# Altium PCB Copy of PCB1.PcbDoc (part 5 of 9)
Units mm, origin at the board's own origin, x right, y up, seen from the top; angles counter-clockwise.
Board outline 100 x 100 mm, 6 copper layers (Top Layer, Int1 (GND), Int2 (Sign), Int3 (Sign), Int4 (PWR), Bottom Layer), stack 1.538 mm thick; 614 components, 712 nets, 3013 pads, 501 vias.
Unrouted connection lines stored in the file: 259.
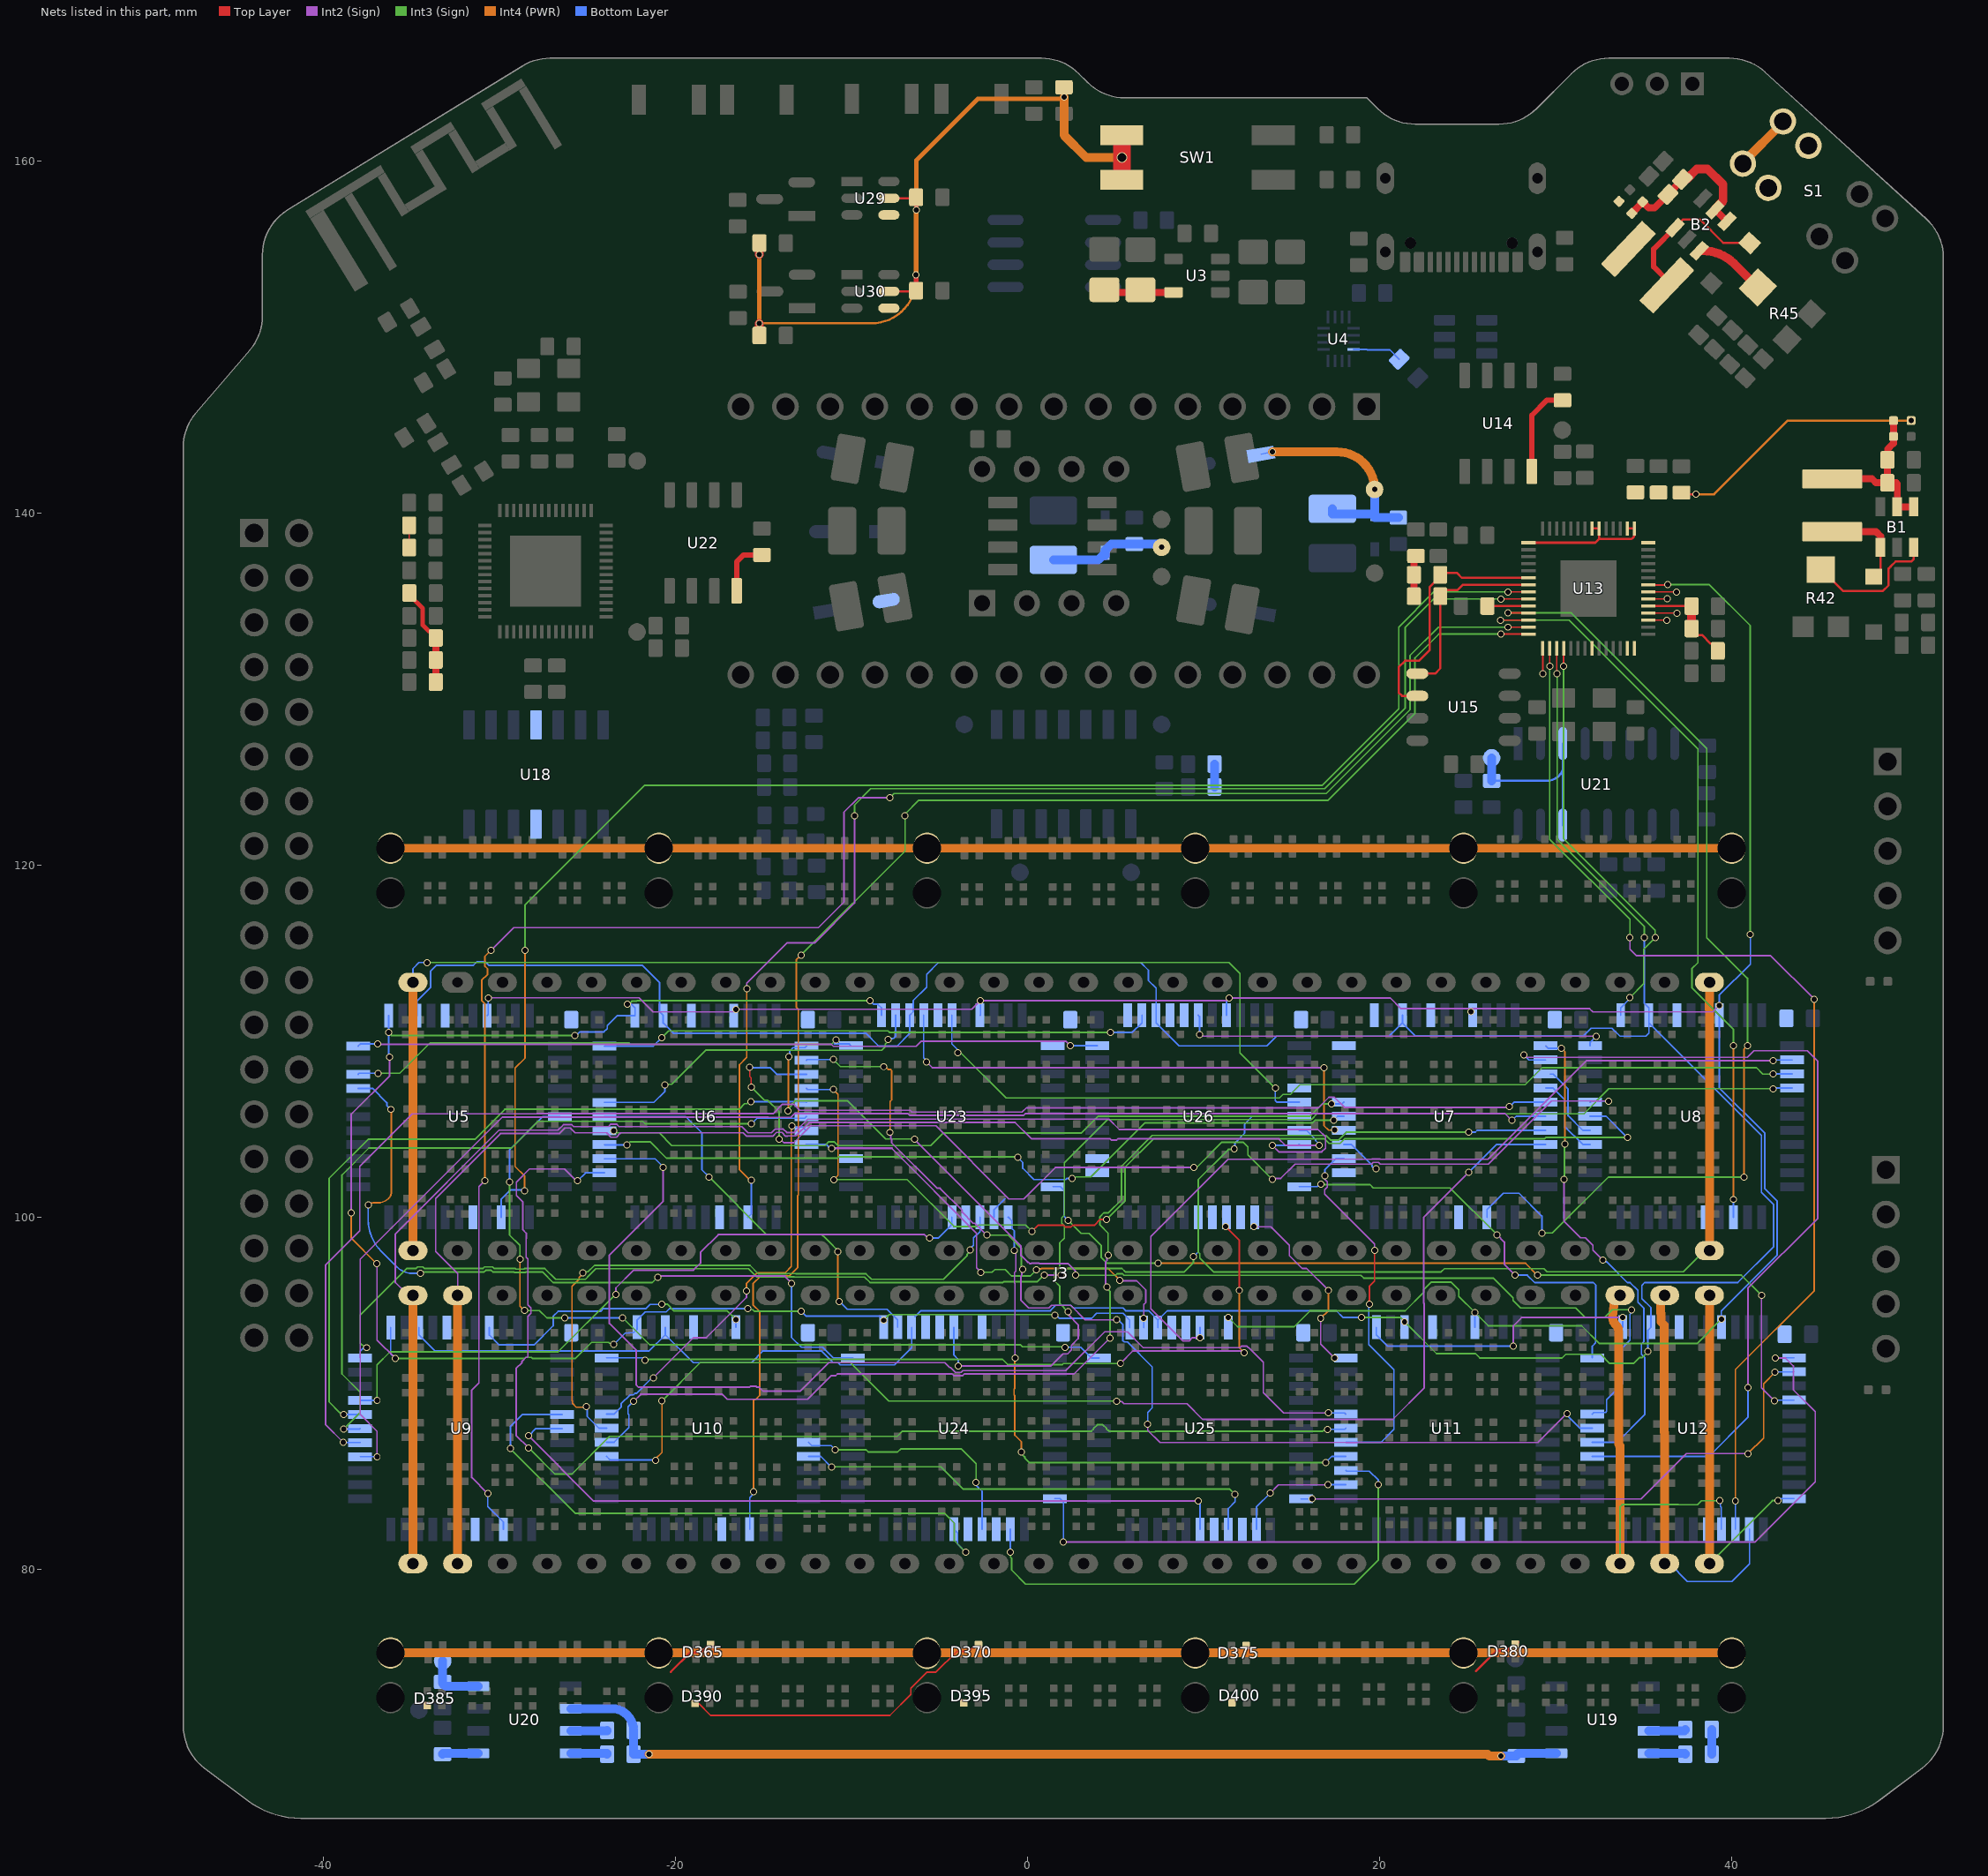
[diagram p8: the nets of this part, all layers, seen from the top]

## Via types
v1: diameter 0.4, hole 0.3, Top Layer to Bottom Layer, tented both sides, 494 vias
v2: diameter 0.4, hole 0.3, Top Layer to Bottom Layer, 5 vias
v3: diameter 0.4, hole 0.3, Top Layer to Bottom Layer, tented top, 1 vias
v4: diameter 0.6, hole 0.5, Top Layer to Bottom Layer, 1 vias

## Nets (pads, with @x,y where several pads share a name; then routed paths per layer and width w, separated by ;. In a path a pad name is that pad's centre, name@x,y a point inside that pad or via, vN(x,y) a via of type N, cw(c..) or ccw(c..) an arc to the next point about the centre after c; other vN are vias at no path point) (continued)
B_B58: J3.58 U12.15 | length 26.3
  Int3 (Sign) w0.09: J3.58@33.648,80.336 33.648,83.557 33.778,83.686 36.968,83.686 36.978,83.677 38.041,83.677 38.269,83.904 v1(39.305,83.904)
  Int4 (PWR) w0.5: J3.58@33.648,80.336 33.648,87.03 33.566,87.112 33.566,93.528 ccw(c33.066,93.528) 33.409,93.891 cw(c33.805,94.312) 33.232,94.379 33.373,95.576 J3.58@33.648,95.576
  Bottom Layer w0.09: v1(39.305,83.904) 39.355,83.854 39.355,83.569 39.405,83.519 U12.15@39.405,82.288
B_B59: J3.59 U12.13 | length 23
  Int4 (PWR) w0.5: J3.59@36.188,80.336 36.188,87.766 36.156,87.797 36.156,93.889 35.982,94.064 35.982,94.542 35.959,94.564 35.959,95.347 J3.59@36.188,95.576
  Bottom Layer w0.09: J3.59@36.188,80.336 36.463,80.336 37.478,79.32 39.998,79.32 41.005,80.327 U12.13@41.005,82.288
B_B60: J3.60 U12.11 | length 21.6
  Int3 (Sign) w0.09: J3.60@38.728,80.336 J3.60@38.728,80.336 39.196,80.802 39.196,80.804 42.302,83.91 v1(42.63,83.91)
  Int4 (PWR) w0.5: J3.60@38.728,80.336 J3.60@38.728,95.576
  Bottom Layer w0.09: v1(42.63,83.91) 42.621,83.91 42.734,84.023 U12.11@43.54,84.023
BB_1_1: J3.1 U26.5 | length 72.8
  Int3 (Sign) w0.09: v1(-34.139,114.48) 11.43,114.48 12.06,113.85 12.06,109.35 v1(14.064,107.347)
  Int4 (PWR) w0.5: J3.1@-34.932,98.116 J3.1@-34.932,113.356
  Bottom Layer w0.09: J3.1@-34.932,113.356 -34.932,114.138 -34.59,114.48 v1(-34.139,114.48) ; v1(14.064,107.347) 14.064,106.646 14.162,106.548 U26.5@15.422,106.548
BB_30_1: J3.30 U26.6 | length 57.4
  Int3 (Sign) w0.09: v1(11.729,103.904) 11.686,103.861 11.394,103.861 9.687,102.154 9.687,98.026 9.777,97.936 9.777,97.68 10.553,96.904 23.486,96.904 23.674,97.092 29.323,97.092 29.505,96.91 37.247,96.91 38.453,98.116 J3.30@38.728,98.116
  Int4 (PWR) w0.5: J3.30@38.728,98.116 38.728,111.795 38.71,111.812 38.71,112.29 38.728,112.308 J3.30@38.728,113.356
  Bottom Layer w0.09: v1(11.729,103.904) 11.772,103.948 11.772,104.239 12.318,104.785 12.318,105.308 12.758,105.748 U26.6@15.422,105.748
BB_31_1: J3.31 U26.8 | length 81.4
  Int2 (Sign) w0.09: J3.31@-34.932,95.576 -35.207,95.576 -35.929,96.298 -35.929,99.067 -30.043,104.954 -26.698,104.954 -26.381,105.272 -25.915,105.272 -25.797,105.154 -23.826,105.154 -23.68,105.299 -23.372,105.299 -23.227,105.154 -16.248,105.154 -15.899,104.805 -14.571,104.805 -14.358,105.018 -13.892,105.018 -13.699,104.825 -13.257,104.825 -12.497,105.585 4.609,105.585 5.199,104.995 16.496,104.995 16.916,104.575 16.916,103.94 16.698,103.722 14.269,103.722 v1(13.897,104.094)
  Int4 (PWR) w0.5: J3.31@-34.932,80.336 J3.31@-34.932,95.576
  Bottom Layer w0.09: v1(13.897,104.094) 15.369,104.094 U26.8@15.422,104.148
BB_32_1: J3.32 U26.7 | length 76.2
  Int2 (Sign) w0.09: J3.32@-32.392,95.576 -32.392,96.82 -33.645,98.072 -33.645,101.083 -29.964,104.764 -26.62,104.764 -26.302,105.082 -25.994,105.082 -25.717,104.805 -23.898,104.805 -23.898,104.773 -23.68,104.555 -23.372,104.555 -23.154,104.773 -23.154,104.805 -16.168,104.805 -15.977,104.615 -14.492,104.615 -14.279,104.828 -13.971,104.828 -13.757,104.615 -13.664,104.615 -13.644,104.635 -13.179,104.635 -12.419,105.395 -0.715,105.395 0.213,104.466 4.675,104.466 4.74,104.402 5.048,104.402 5.113,104.466 14.269,104.466 14.641,104.094 v1(16.544,104.094)
  Int4 (PWR) w0.5: J3.32@-32.392,80.336 J3.32@-32.392,95.576
  Bottom Layer w0.09: U26.7@15.422,104.948 15.847,104.948 16.354,104.441 16.354,104.369 16.544,104.178 v1(16.544,104.094)
BB_BOTTOM_RAIL_1: J3.63 S1.7 | length 76.2
  Int4 (PWR) w0.5: J3.63@-36.202,75.256 J3.63@-20.962,75.256 J3.63@9.518,75.256 J3.63@24.758,75.256 J3.63@39.998,75.256
BB_TOP_RAIL_1: J3.61 S1.3 | length 76.2
  Int4 (PWR) w0.5: J3.61@-36.202,120.976 J3.61@-20.962,120.976 J3.61@-5.722,120.976 J3.61@9.518,120.976 J3.61@24.758,120.976 J3.61@39.998,120.976
BC0_3: U6.27 U7.29 | length 43
  Int3 (Sign) w0.09: v1(-23.526,104.927) -23.404,104.805 -20.943,104.805 -20.221,104.084 -11.52,104.084 -11.306,104.298 -10.998,104.298 -10.785,104.084 -7.971,104.084 -7.968,104.081 -7.502,104.081 -7.5,104.084 -5.521,104.084 -4.814,104.791 3.035,104.791 3.998,105.754 16.037,105.754 16.735,106.452 v1(17.261,106.452)
  Bottom Layer w0.09: v1(17.261,106.452) 17.856,106.452 U7.29@17.952,106.548
BC1_3: U6.26 U7.28 | length 44.8
  Int3 (Sign) w0.09: v1(-22.763,104.125) -22.763,104.113 -22.579,104.297 -21.452,104.297 -20.522,103.368 -10.811,103.368 -10.734,103.445 -0.614,103.445 v1(-0.578,103.409) ; v1(2.508,102.225) 2.529,102.246 2.529,102.3 3.59,102.3 6.664,105.374 16.194,105.374 16.345,105.525 v1(17.384,105.525)
  Bottom Layer w0.09: U6.26@-24.048,104.133 -24.04,104.125 v1(-22.763,104.125) ; v1(-0.578,103.409) -0.289,103.12 -0.289,102.796 0.354,102.153 2.157,102.153 2.225,102.221 2.504,102.221 v1(2.508,102.225) ; v1(17.384,105.525) 17.607,105.748 U7.28@17.952,105.748
BD0_3: U6.3 U8.29 | length 63.1
  Top Layer w0.09: v1(-15.796,108.538) -15.796,108.003 -15.721,107.928 -15.721,107.41 v1(-15.702,107.391)
  Int2 (Sign) w0.09: v1(-14.125,104.456) -14.075,104.456 -13.863,104.244 -13.3,104.244 -12.34,105.205 -5.225,105.205 -1.071,101.051 -0.221,101.051 1.568,102.839 v1(9.434,102.839) ; v1(13.897,102.161) 13.956,102.22 14.374,102.22 15.182,103.028 19.524,103.028 19.625,103.128 19.933,103.128 20.033,103.028 26.163,103.028 29.746,106.611 v1(33.006,106.611)
  Int3 (Sign) w0.09: v1(-15.702,107.391) -14.976,106.665 -14.791,106.665 -14.125,105.999 v1(-14.125,104.456) ; v1(9.434,102.839) 9.592,102.839 11.03,104.276 12.24,104.276 12.511,104.005 12.511,103.547 v1(13.897,102.161)
  Bottom Layer w0.09: v1(-15.796,108.538) -15.768,108.509 -14.648,108.509 -14.272,108.133 U6.3@-12.578,108.133 ; U8.29@31.952,106.548 32.016,106.611 v1(33.006,106.611)
BD1_3: U6.4 U8.28 | length 59.5
  Top Layer w0.09: v1(0.238,99.21) 0.578,99.55 2.048,99.55 2.142,99.456 2.45,99.456 2.543,99.55 3.774,99.55 4.114,99.89 v1(4.475,99.89)
  Int3 (Sign) w0.09: v1(-11.013,102.148) -6.857,102.148 -4.198,99.489 -2.879,99.489 -2.795,99.573 -0.125,99.573 v1(0.238,99.21) ; v1(4.475,99.89) 5.518,100.932 5.518,102.839 7.145,104.466 16.858,104.466 17.117,104.208 17.74,104.208 17.998,104.466 29.348,104.466 29.424,104.542 v1(34.07,104.542)
  Int4 (PWR) w0.09: v1(-11.05,107.266) -10.78,106.996 -10.78,102.388 -11.013,102.155 v1(-11.013,102.148)
  Bottom Layer w0.09: U6.4@-12.578,107.333 -12.511,107.266 v1(-11.05,107.266) ; U8.28@31.952,105.748 32.864,105.748 v1(34.07,104.542)
BE0_3: U6.5 U9.29 | length 43.7
  Int3 (Sign) w0.09: v1(-38.877,88.808) -38.961,88.808 -39.052,88.899 -39.079,88.899 -39.694,89.514 -39.694,102.224 -37.476,104.442 -31.419,104.442 -29.714,106.147 -16.398,106.147 -16.086,106.459 -15.937,106.459 -15.819,106.576 v1(-15.736,106.576)
  Bottom Layer w0.09: v1(-38.877,88.808) U9.29@-37.93,88.808 ; v1(-15.736,106.576) -12.621,106.576 U6.5@-12.578,106.533
BE1_3: U6.6 U9.28 | length 44.1
  Int3 (Sign) w0.09: v1(-38.877,87.973) -37.93,88.919 -37.93,90.07 -38.97,91.11 -38.97,102.411 -37.438,103.943 -29.339,103.943 -27.819,105.462 -21.874,105.462 -21.731,105.319 v1(-15.702,105.319)
  Bottom Layer w0.09: v1(-38.877,87.973) -37.965,87.973 U9.28@-37.93,88.008 ; v1(-15.702,105.319) -15.383,105.639 -12.672,105.639 U6.6@-12.578,105.733
BF0_3: U6.7 U10.29 | length 23.5
  Int2 (Sign) w0.09: v1(-21.275,90.884) -18.993,93.167 -18.265,93.167 -15.981,95.451 -15.981,95.825 v1(-15.986,95.829)
  Int4 (PWR) w0.09: v1(-15.986,95.829) -15.986,96.239 -15.365,96.86 -13.777,96.86 -13.433,97.204 -13.433,105.175 v1(-13.411,105.197)
  Bottom Layer w0.09: U10.29@-23.93,88.823 -23.505,88.823 -23.104,89.224 -23.104,89.324 -23.104,89.409 -22.597,89.916 -22.412,89.916 -22.325,90.003 -22.245,90.003 -21.395,90.853 -21.395,90.865 -21.376,90.884 v1(-21.275,90.884) ; v1(-13.411,105.197) -13.352,105.138 -12.783,105.138 U6.7@-12.578,104.933
BG0_3: U6.25 U11.29 | length 63.2
  Int2 (Sign) w0.09: v1(-20.73,102.829) -20.713,102.812 -20.713,100.931 -23.775,97.869 -23.775,93.971 -22.245,92.441 -22.245,90.476 -22.123,90.353 -15.814,90.353 -15.754,90.413 -15.446,90.413 -15.387,90.353 -15.256,90.353 -15.031,90.128 -12.93,90.128 -11.309,91.749 -4.709,91.749 -4.434,91.475 -4.385,91.475 -4.105,91.195 -3.797,91.195 -3.693,91.299 2.164,91.299 4.37,93.506 5.653,93.506 6.553,92.605 12.064,92.605 12.145,92.686 12.453,92.686 12.534,92.605 12.55,92.605 13.383,91.773 13.383,90.039 14.527,88.895 v1(17.082,88.895)
  Bottom Layer w0.09: U6.25@-24.048,103.333 -21.172,103.333 -20.73,102.891 v1(-20.73,102.829) ; v1(17.082,88.895) 17.998,88.895 U11.29@18.07,88.823
BG1_3: U6.24 U11.28 | length 70.4
  Int2 (Sign) w0.09: v1(-28.363,86.905) -29.072,87.615 -29.072,91.418 -28.735,91.756 -28.735,91.834 -28.517,92.052 -28.438,92.052 -28.399,92.091 -28.399,94.378 -28.223,94.554 -28.223,94.862 -28.399,95.038 -28.399,97.638 -28.499,97.738 -28.499,98.263 -28.503,98.266 -28.503,98.791 -28.495,98.799 -28.495,99.107 -28.685,99.297 -28.685,100.87 -29.057,101.242 -29.057,102.009 -28.313,102.753 -26.325,102.753 -25.65,102.078 v1(-25.582,102.078)
  Int3 (Sign) w0.09: v1(-28.363,86.905) -26.878,85.42 -25.893,85.42 -23.755,87.558 -7.407,87.558 -7.112,87.853 3.615,87.853 3.734,87.971 3.734,88.005 3.952,88.223 4.26,88.223 4.478,88.005 4.478,87.958 4.53,87.906 4.577,87.906 4.63,87.853 4.682,87.853 6.881,87.853 6.917,87.817 7.225,87.817 7.261,87.853 16.748,87.853 16.797,87.901 16.967,87.901 v1(17.027,87.961)
  Bottom Layer w0.09: v1(-25.582,102.078) -25.128,102.533 U6.24@-24.048,102.533 ; v1(17.027,87.961) 18.007,87.961 U11.28@18.07,88.023
BH0_3: U6.1 U12.29 | length 66
  Int2 (Sign) w0.09: v1(-6.421,104.456) -6.421,104.412 -0.384,98.375 -0.384,97.831 -0.011,97.458 0.033,97.458 0.11,97.382 0.19,97.382 0.202,97.394 0.647,97.394 0.659,97.382 2.288,97.382 2.706,96.964 v1(2.706,96.729)
  Int3 (Sign) w0.09: v1(-13.62,106.059) -13.62,106.143 -13.433,106.33 -13.433,106.41 -13.222,106.621 -10.239,106.621 -8.079,104.461 -6.426,104.461 v1(-6.421,104.456) ; v1(2.706,96.729) 2.721,96.714 4.988,96.714 5.074,96.801 5.382,96.801 5.469,96.714 18.926,96.714 19.086,96.554 26.447,96.554 27.571,95.431 27.571,95.277 27.994,94.854 31.137,94.854 31.679,94.312 32.76,94.312 33.204,94.756 v1(34.303,94.756)
  Int4 (PWR) w0.09: v1(-13.62,106.059) -13.573,106.105 -13.6,106.132 -13.6,109.112 v1(-13.58,109.132)
  Bottom Layer w0.09: v1(-13.58,109.132) -13.521,109.191 -13.521,109.459 -13.335,109.645 -12.666,109.645 U6.1@-12.578,109.733 ; U12.29@32.07,88.823 32.166,88.92 32.827,88.92 32.89,88.982 32.89,89.643 33.771,90.524 33.771,92.584 34.21,93.023 34.21,94.493 34.295,94.578 34.311,94.578 34.311,94.706 34.303,94.714 v1(34.303,94.756)
BH1_3: U6.2 U12.28 | length 62.3
  Int2 (Sign) w0.09: v1(-7.825,104.833) -7.78,104.788 -7.78,104.498 -7.735,104.453 -7.735,104.24 -5.15,101.655 -4.985,101.655 -3.721,100.391 -3.721,100.29 -3.103,99.672 -3.006,99.672 v1(-2.328,98.994) ; v1(-0.297,97.045) -0.339,97.003 -0.339,96.71 -0.384,96.665 -0.384,95.291 0.054,94.854 1.202,94.854 1.353,95.005 2.442,95.005 3.265,94.183 v1(5.057,94.183) ; v1(6.814,88.25) 6.814,87.902 7.508,87.209 28.983,87.209 v1(30.64,88.865)
  Int3 (Sign) w0.09: v1(-11.05,108.973) -10.644,108.568 v1(-8.176,108.568) ; v1(-2.328,98.994) -1.112,98.994 -0.369,98.251 -0.369,97.226 -0.356,97.213 -0.356,97.105 v1(-0.297,97.045)
  Int4 (PWR) w0.09: v1(-8.176,108.568) -8.092,108.568 -7.934,108.409 -7.799,108.409 -7.735,108.346 -7.735,106.676 -7.825,106.586 v1(-7.825,104.833)
  Bottom Layer w0.09: U6.2@-12.578,108.933 -12.537,108.973 v1(-11.05,108.973) ; v1(5.057,94.183) 5.135,94.183 5.395,93.923 5.395,93.008 5.48,92.923 5.659,92.923 7.071,91.511 7.071,89.18 6.814,88.923 v1(6.814,88.25) ; v1(30.64,88.865) 30.64,88.758 31.375,88.023 U12.28@32.07,88.023
BOTTOM1_RGB_OUT_8: D365.4 D385.1 | length 3.1
  Top Layer w0.127: -20.28,74.18 -19.17,75.291 -18.553,75.291 -18.183,75.661 -18.032,75.661 D365.4@-17.88,75.813
BOTTOM2_RGB_OUT_8: D370.4 D390.1 | length 18.1
  Top Layer w0.09: D390.1@-18.71,72.393 -18.025,71.707 -7.837,71.707 -6.644,72.9 -6.644,73.248 -5.721,74.171 -5.211,74.171 -4.042,75.34 -3.356,75.34 -3.149,75.548 -2.969,75.548 D370.4@-2.799,75.718
BOTTOM3_RGB_OUT_8: D375.4 D395.1
BOTTOM4_RGB_OUT_8: D380.4 D400.1 | length 3.1
  Top Layer w0.127: 25.47,74.23 26.621,75.382 27.137,75.382 27.213,75.459 27.315,75.459 27.567,75.711 27.718,75.711 D380.4@27.87,75.863
BUCK1_3v3: C3.2 C4.2 C5.2 C7.2 C8.2 C9.2 C10.2 C11.2 C12.2 C14.2 C46.2 C48.2 C62.2 C63.2 C64.2 C70.2 C85.2 C86.2 JP1.2 JP3.2 L4.1 R1.1 R8.2 R9.2 R16.2 R17.2 R19.2 R20.2 R29.2 R30.2 R35.2 R36.2 R38.2 R39.2 R47.1 R49.1 S1.4 S1.8 SW1.3 SW1.4 U3.5 U4.4 U13.1 U13.10 U13.22 U13.33 U13.42 U13.43 U13.44 U13.48 U13.49 U14.8 U19.5 U20.2 U20.5 U22.8 U23.1 U29.5 U30.5 | length 167.7
  Top Layer w0.09: R38.2@-35.145,138.058 L4.1@-35.145,139.318 ; R39.2@-35.14,135.37 R39.2@-35.14,135.47
  Top Layer w0.127: U30.5@-7.894,152.608 -6.395,152.608 C86.2@-6.345,152.658 ; U29.5@-7.895,157.908 -6.395,157.908 C85.2@-6.345,157.958 ; v1(2.055,163.662) R1.1@2.055,164.208 ; C3.2@4.355,152.708 C3.2@4.505,152.558 ; C12.2@26.109,134.735 U13.10@28.453,134.735 ; U13.1@28.453,138.335 32.246,138.335 32.457,138.546 ; U13.49@32.057,139.138 U13.48@32.457,139.138 32.457,138.546 ; U13.44@34.057,139.138 U13.43@34.457,139.138 ; C7.2@34.457,141.129 C7.2@34.524,141.196 C7.2@34.532,141.188 ; U13.43@34.461,138.789 cw(c34.218,138.789) 34.218,138.546 32.457,138.546 ; U13.33@35.26,134.735 37.711,134.735 C10.2@37.718,134.728 ; C9.2@37.142,141.179 37.237,141.084 v1(37.964,141.084) ; C11.2@37.718,133.458 37.718,133.419 38.051,133.086 38.308,133.086 38.789,132.605 38.869,132.605 39.203,132.271 R8.2@39.203,132.191
  Top Layer w0.254: R39.2@-35.14,135.37 -34.38,134.61 -34.38,133.66 -34.013,133.293 -33.913,133.293 -33.64,133.02 C64.2@-33.64,132.92 ; C86.2@-6.345,152.658 v1(-6.345,153.558) ; C85.2@-6.345,157.958 -6.33,157.942 v1(-6.33,157.245)
  Top Layer w0.3: U22.8@-16.54,135.602 -16.54,137.245 -16.145,137.64 C70.2@-15.105,137.64 ; U14.8@28.635,142.385 28.635,145.575 29.485,146.425 C14.2@30.381,146.425
  Top Layer w0.4: C63.2@-33.64,130.42 C62.2@-33.64,131.67 C64.2@-33.64,132.92 ; C3.2@4.505,152.558 U3.5@8.28,152.558 ; R35.2@21.935,135.297 R36.2@21.935,136.513 21.945,136.522 21.945,137.471 R9.2@22.055,137.581
  Top Layer w0.5: R49.1@-15.245,150.108 v1(-15.245,150.795) ; v1(-15.245,154.695) R47.1@-15.245,155.358 ; C11.2@37.718,133.458 C10.2@37.718,134.728
  Top Layer w1: SW1.4@5.339,158.949 v4(5.339,160.219) SW1.3@5.339,161.489
  Int4 (PWR) w0.127: v1(-15.245,150.795) -8.885,150.795 ccw(c-8.885,153.335) -6.345,153.335 v1(-6.345,153.558) ; v1(37.964,141.084) 38.994,141.084 43.179,145.269 v1(50.183,145.269)
  Int4 (PWR) w0.254: v1(-15.245,150.795) v1(-15.245,154.695) ; v1(-6.345,153.558) -6.345,157.23 v1(-6.33,157.245) -6.33,160.061 -2.835,163.556 v1@2.055,163.556
  Int4 (PWR) w0.5: v1(-21.525,69.495) 26.13,69.495 26.217,69.408 v1(26.87,69.408) ; v1(2.055,163.662) 2.055,163.556 2.055,161.489 3.325,160.219 v4(5.339,160.219) ; S1.8@40.63,159.871 40.63,159.932 42.902,162.204 S1.4@42.902,162.265
  Bottom Layer w0.09: U4.4@18.506,149.308 19.277,149.308 19.291,149.294 20.566,149.294 C5.2@21.102,148.758
  Bottom Layer w0.127: S1.8@40.63,159.871 S1.8@40.63,159.932 ; S1.4@42.902,162.204 S1.4@42.902,162.265
  Bottom Layer w0.5: C48.2@-33.245,69.508 cw(c-33.2,69.508) -33.2,69.553 U20.5@-31.22,69.553 ; U20.2@-25.97,72.093 -23.63,72.093 cw(c-23.63,70.858) R19.2@-22.395,70.858 R20.2@-22.395,69.508 -21.538,69.508 v1(-21.525,69.495) ; R29.2@10.605,124.458 R30.2@10.605,125.758 ; v1(26.87,69.408) C46.2@27.755,69.408 cw(c27.9,69.408) 27.9,69.553 U19.5@30.03,69.553 ; R17.2@38.855,69.508 R16.2@38.855,70.908
BUCK1_FB_11: B1.3 R42.2 | length 7.8
  Top Layer w0.127: R42.2@45.06,136.81 45.11,136.81 46.337,135.583 48.571,135.583 48.905,135.916 48.905,136.86 49.015,136.971 49.015,136.978 49.302,137.265 50.187,137.265 50.34,137.418 B1.3@50.34,138.075
BUCK1_SW_11: B1.1 D410.2 L5.1 | length 5.3
  Top Layer w0.127: D410.2@48.055,136.408 48.068,136.408 48.455,136.794 48.455,138.06 B1.1@48.44,138.075
  Top Layer w0.4: L5.1@45.705,138.958 48.195,138.958 48.455,138.698 48.455,138.09 B1.1@48.44,138.075 ; D410.2@48.046,136.417 D410.2@48.055,136.408
BUCK1_VIN_11: B1.4 B1.5 C79.2 C80.2 JP1.1 JP2.1 L5.2 | length 10.1
  Top Layer w0.4: L5.2@45.705,141.958 47.972,141.958 48.15,141.78 48.195,141.735 C80.2@48.84,141.735 ; JP1.1@49.183,145.269 JP2.1@49.183,144.369 49.183,143.983 48.855,143.655 48.855,143.055 C79.2@48.84,143.04 C80.2@48.84,141.735 ; B1.4@50.34,140.375 49.455,140.375 49.405,140.325 49.405,140.173 49.39,140.187 B1.5@49.39,140.375 49.405,140.39 49.405,141.661 49.33,141.735 C80.2@48.84,141.735
BUCK2_FB_11: B2.3 R45.2 | length 4.1
  Top Layer w0.5: B2.3@38.146,154.924 38.34,154.924 cw(c38.34,152.384) 40.136,154.18 R45.2@41.473,152.843
BUCK2_SW_11: B2.1 D411.2 L6.1 | length 9.2
  Top Layer w0.127: B2.1@36.768,156.232 37.234,156.698 38.182,156.698 39.503,155.377 40.997,155.377 D411.2@41.015,155.36 D411.2@41.014,155.242
  Top Layer w0.3: L6.1@36.305,152.958 36.305,153.262 35.56,154.006 35.56,155.025 B2.1@36.768,156.232
BUCK2_VIN_11: B2.4 B2.5 C83.2 C84.2 JP3.1 JP4.1 L6.2 | length 9.5
  Top Layer w0.4: JP3.1@34.32,157.043 34.32,157.066 34.929,157.675 JP4.1@34.929,157.697 35.268,157.359 35.617,157.359 C83.2@36.374,158.116 36.651,158.405 36.917,158.686 C84.2@37.193,158.975 ; B2.5@39.04,157.247 39.058,157.247 39.712,156.593 B2.4@39.729,156.593
  Top Layer w0.5: C84.2@37.193,158.975 37.42,158.975 38.014,159.57 38.619,159.57 39.503,158.686 39.503,157.75 39.04,157.287 B2.5@39.04,157.247
CD0_3: U7.3 U8.27 | length 4.5
  Bottom Layer w0.09: U7.3@29.684,108.146 29.849,108.146 30.697,107.298 30.697,105.778 31.527,104.948 U8.27@31.952,104.948
CD1_3: U7.4 U8.26 | length 4.7
  Bottom Layer w0.09: U7.4@29.422,107.348 29.847,107.348 30.507,106.688 30.507,105.168 31.527,104.148 U8.26@31.952,104.148
CE0_3: U7.5 U9.27 | length 87.6
  Int2 (Sign) w0.09: v1(-38.893,87.214) -38.893,87.224 -39.891,88.222 -39.891,97.313 -37.955,99.249 -37.955,102.909 -34.976,105.888 -27.909,105.888 -27.901,105.896 -14.676,105.896 -14.474,105.896 -13.938,106.431 -13.301,106.431 -12.951,106.082 -6.683,106.082 -6.588,105.986 -0.32,105.986 -0.081,106.224 16.507,106.224 17.107,106.824 17.415,106.824 17.985,106.254 27.322,106.254 v1(27.368,106.299)
  Bottom Layer w0.09: v1(-38.893,87.214) -37.936,87.214 U9.27@-37.93,87.208 ; v1(27.368,106.299) 27.617,106.548 U7.5@29.422,106.548
CE1_3: U7.6 U9.26 | length 83.7
  Int2 (Sign) w0.09: v1(-36.975,86.408) -36.975,87.852 -37.93,88.808 -37.93,97.625 -29.858,105.698 -14.747,105.698 -14.736,105.687 -13.466,105.687 -13.261,105.892 -6.799,105.892 -6.703,105.796 -0.241,105.796 -0.145,105.892 17.225,105.892 17.23,105.897 27.121,105.897 v1(27.5,105.518)
  Bottom Layer w0.09: U9.26@-37.93,86.408 v1(-36.975,86.408) ; v1(27.5,105.518) 27.514,105.518 27.744,105.748 U7.6@29.422,105.748
CF0_3: U7.7 U10.27 | length 68.1
  Int2 (Sign) w0.09: v1(-22.401,89.544) -21.995,89.95 -17.352,89.95 -17.071,89.669 -12.513,89.669 -11.176,91.005 -10.922,91.005 -10.818,91.109 -4.288,91.109 -4.184,91.005 -3.718,91.005 -3.614,91.109 2.622,91.109 4.646,93.134 v1(4.678,93.134) ; v1(4.49,96.055) 4.481,96.055 4.47,96.043 4.422,96.092 4.422,97.478 4.504,97.56 4.504,97.799 v1(4.563,97.858)
  Int3 (Sign) w0.09: v1(4.49,96.055) 4.49,95.971 4.678,95.783 v1(4.678,93.134) ; v1(4.563,97.858) 4.563,99.107 4.103,99.567 4.103,100.044 4.321,100.262 4.578,100.262 5.328,101.011 5.328,102.918 7.066,104.656 16.937,104.656 17.196,104.398 17.661,104.398 18.102,104.838 v1(25.047,104.838)
  Bottom Layer w0.09: U10.27@-23.93,87.223 -23.505,87.223 -22.66,88.068 -22.66,88.782 -22.713,88.835 -22.713,89.236 -22.405,89.544 v1(-22.401,89.544) ; v1(25.047,104.838) 25.055,104.846 25.427,104.846 25.529,104.948 U7.7@29.422,104.948
CF1_3: U7.8 U10.26 | length 71.1
  Int2 (Sign) w0.09: v1(5.057,89.564) 5.073,89.548 5.334,89.548 5.464,89.418 9.041,89.418 9.93,88.529 16.922,88.529 16.927,88.523 17.334,88.523 17.34,88.529 20.742,88.529 22.527,90.313 22.527,95.099 22.491,95.135 22.491,100.005 v1(25.047,102.562)
  Int3 (Sign) w0.09: v1(-20.785,89.578) -18.614,91.749 -10.087,91.749 -7.902,89.564 v1(5.057,89.564)
  Int4 (PWR) w0.09: v1(-21.157,86.192) -21.157,86.276 -20.785,86.648 v1(-20.785,89.578)
  Bottom Layer w0.09: U10.26@-23.93,86.423 -23.725,86.218 -21.183,86.218 v1(-21.157,86.192) ; v1(25.047,102.562) 26.634,104.148 U7.8@29.422,104.148
CG0_3: U7.25 U11.27 | length 21.2
  Top Layer w0.09: v1(19.401,95.072) 19.377,95.096 19.377,95.249 19.405,95.277 19.405,96.077 19.704,96.376 v1(19.704,98.124)
  Int2 (Sign) w0.09: v1(16.87,102.359) 16.87,102.175 17.015,102.03 17.015,101.722 16.87,101.577 16.87,101.328 19.704,98.494 v1(19.704,98.124)
  Bottom Layer w0.09: v1(16.87,102.359) 16.873,102.362 16.873,102.694 17.527,103.348 U7.25@17.952,103.348 ; U11.27@18.07,87.223 20.07,87.223 20.807,87.96 20.807,91.348 19.377,92.778 19.377,95.049 v1(19.401,95.072)
CH0_3: U7.1 U12.27 | length 27.9
  Int2 (Sign) w0.09: v1(30.464,102.153) 30.473,102.162 30.473,99.774 31.409,98.838 31.682,98.838 32.105,98.415 32.105,98.142 v1(32.679,97.568)
  Int3 (Sign) w0.09: v1(30.464,102.153) 30.491,102.18 30.491,104.143 v1(30.518,104.17)
  Int4 (PWR) w0.09: v1(30.317,109.612) 30.518,109.411 v1(30.518,104.17)
  Bottom Layer w0.09: U7.1@29.422,109.748 29.558,109.612 v1(30.317,109.612) ; U12.27@32.07,87.223 33.481,87.223 35.047,88.789 35.047,92.039 34.864,92.222 34.864,92.802 35.01,92.948 35.01,93.022 ; v1(32.679,97.568) 32.762,97.568 32.849,97.482 32.886,97.482 34.07,96.298 34.222,96.298 34.66,95.86 34.66,95.189 35,94.849 35,93.798 35.01,93.788 35.01,93.023
CH1_3: U7.2 U12.26 | length 50.2
  Int2 (Sign) w0.09: v1(28.19,109.233) 28.19,109.085 28.2,109.095 40.887,109.095 41.266,109.474 44.287,109.474 44.882,108.879 44.882,99.947 40.916,95.981 v1(40.916,90.34)
  Bottom Layer w0.09: v1(28.19,109.233) 28.475,108.948 U7.2@29.422,108.948 ; U12.26@32.07,86.423 38.693,86.423 40.916,88.646 v1(40.916,90.34)
CH446_CLK: U5.34 U6.34 U7.34 U8.34 U9.34 U10.34 U11.34 U12.34 U13.18 U23.34 U24.34 U25.34 U26.34 | length 139
  Top Layer w0.09: v1(30.446,131.31) 30.446,132.32 U13.18@30.457,132.331
  Int2 (Sign) w0.09: v1(-38.436,100.247) -38.436,105.873 -36.259,108.051 v1(-36.259,109.108) ; v1(-36.989,97.366) -36.975,97.352 -36.975,93.037 v1(-35.929,91.991) ; v1(27.583,92.683) 27.583,93.834 28.061,94.312 v1(33.805,94.312)
  Int3 (Sign) w0.09: v1(-36.322,110.505) -36.156,110.339 v1(-25.729,110.339) ; v1(-35.929,91.991) -28.577,91.991 -28.517,92.052 -28.208,92.052 -28.148,91.991 -25.693,91.991 -24.78,92.905 -23.822,92.905 -23.766,92.849 -23.576,92.849 v1(-23.517,92.79) ; v1(-22.757,112.106) -22.673,112.106 -22.493,112.286 -22.232,112.286 -22.197,112.322 v1(-8.966,112.322) ; v1(-15.913,94.819) -15.854,94.76 -15.628,94.76 -15.533,94.665 v1(-12.866,94.665) ; v1(-8.195,94.155) -7.869,94.481 1.493,94.481 v1(1.541,94.433) ; v1(30.446,131.31) 30.446,121.504 35.645,116.305 v1(35.645,115.89) 34.995,115.24 34.995,113.275 v1(34.203,112.483)
  Int4 (PWR) w0.09: v1(-38.436,100.247) -38.436,98.814 v1(-36.989,97.366)
  Bottom Layer w0.09: U5.34@-36.313,111.468 -36.313,110.505 -36.313,109.162 v1(-36.259,109.108) ; U9.34@-36.195,93.743 -36.195,92.257 v1(-35.929,91.991) ; v1(-25.729,110.339) -25.654,110.339 -25.452,110.541 -24.081,110.541 -23.892,110.729 -23.892,110.892 -23.316,111.468 U6.34@-22.313,111.468 -22.313,111.893 -22.518,112.098 -22.749,112.098 v1(-22.757,112.106) ; v1(-23.517,92.79) -22.874,93.433 -22.647,93.433 -22.647,93.451 -22.4,93.451 -22.195,93.656 U10.34@-22.195,93.758 -22.195,94.183 -21.743,94.636 -20.544,94.636 -20.36,94.819 v1(-15.913,94.819) ; v1(-12.866,94.665) -12.589,94.388 -8.4,94.388 -8.4,94.36 v1(-8.195,94.155) ; v1(-8.966,112.322) -8.757,112.113 -8.518,112.113 -8.313,111.908 U23.34@-8.313,111.483 ; v1(1.541,94.433) 1.625,94.433 1.797,94.261 3.621,94.261 3.915,94.555 5.403,94.555 5.79,94.168 U25.34@5.79,93.743 ; U11.34@19.805,93.758 19.805,93.333 20.455,92.683 v1(27.583,92.683) ; U8.34@33.687,111.483 33.687,111.908 34.203,112.423 v1(34.203,112.483) ; U12.34@33.805,93.758 v1(33.805,94.312)
CH446_CS_A: U5.14 U13.8 | length 86.4
  Top Layer w0.09: v1(27.291,135.535) U13.8@28.453,135.535
  Int3 (Sign) w0.09: v1(-28.56,115.185) -28.56,117.762 -21.769,124.553 16.733,124.553 21.075,128.895 21.075,133.542 23.068,135.535 v1(27.291,135.535)
  Int4 (PWR) w0.09: v1(-28.584,101.503) -28.584,102.343 -29.13,102.889 -29.13,108.488 -28.56,109.057 v1(-28.56,115.185)
  Bottom Layer w0.09: U5.14@-29.913,99.998 -29.913,101.041 -29.397,101.556 -28.637,101.556 v1(-28.584,101.503)
CH446_CS_B: U6.14 U13.9 | length 73.3
  Top Layer w0.09: v1(26.875,135.135) U13.9@28.453,135.135
  Int2 (Sign) w0.09: v1(-15.969,112.997) -15.969,113.3 -13.662,115.607 -12.091,115.607 -9.84,117.858 v1(-9.84,122.825)
  Int3 (Sign) w0.09: v1(-9.84,122.825) -9.84,123.435 -8.917,124.358 16.87,124.358 21.435,128.923 21.435,133.513 23.057,135.135 v1(26.875,135.135)
  Int4 (PWR) w0.09: v1(-15.969,112.997) -15.969,109.09 -16.377,108.682 -16.377,102.704 -16.324,102.651 -16.313,102.651 -15.773,102.111 v1(-15.702,102.111)
  Bottom Layer w0.09: U6.14@-15.913,99.998 -15.708,100.203 -15.708,102.105 v1(-15.702,102.111)
CH446_CS_C: U7.14 U13.11 | length 59.3
  Top Layer w0.09: v1(27.294,134.344) 28.443,134.345 U13.11@28.453,134.335
  Int3 (Sign) w0.09: v1(27.294,134.344) 30.886,134.344 38.58,126.651 38.58,115.895 40.887,113.587 v1(40.887,109.748) ; v1(29.207,99.114) 29.812,99.114 32.988,102.289 v1(40.686,102.289)
  Int4 (PWR) w0.09: v1(40.686,102.289) 40.686,109.547 v1(40.887,109.748)
  Bottom Layer w0.09: U7.14@26.087,100.013 26.087,100.438 27.026,101.376 27.91,101.376 29.207,100.079 v1(29.207,99.114)
CH446_CS_D: U8.14 U13.12 | length 43.6
  Top Layer w0.09: v1(26.862,133.935) U13.12@28.453,133.935
  Int3 (Sign) w0.09: v1(26.862,133.935) 30.759,133.935 38.076,126.617 38.076,114.471 37.731,114.126 37.731,113.057 40.087,110.7 v1(40.087,109.748)
  Int4 (PWR) w0.09: v1(40.087,101.023) v1(40.087,109.748)
  Bottom Layer w0.09: U8.14@40.087,100.013 v1(40.087,101.023)
CH446_CS_E: U9.14 U13.13 | length 105.7
  Top Layer w0.09: v1(27.281,133.535) U13.13@28.453,133.535
  Int2 (Sign) w0.09: v1(-30.849,102.078) -31.185,101.743 -31.185,90.604 -31.592,90.197 -31.592,85.226 v1(-30.679,84.312) ; v1(-30.485,115.185) -29.21,116.46 -11.897,116.46 -10.442,117.916 -10.442,123.026 -9.628,123.84 v1(-7.83,123.84)
  Int3 (Sign) w0.09: v1(-7.83,123.84) -7.59,124.08 16.955,124.08 21.72,128.845 21.72,131.925 23.33,133.535 v1(27.281,133.535)
  Int4 (PWR) w0.09: v1(-30.849,102.078) -30.849,112.146 -31.028,112.324 -31.028,113.477 -30.692,113.813 -30.692,114.121 -30.849,114.279 -30.849,114.821 v1(-30.485,115.185)
  Bottom Layer w0.09: v1(-30.679,84.312) -30.679,83.582 -29.795,82.698 U9.14@-29.795,82.273
CH446_CS_F: U10.14 U13.14 | length 87.2
  Top Layer w0.09: v1(26.873,133.146) 26.878,133.14 28.448,133.14 U13.14@28.453,133.135
  Int3 (Sign) w0.09: v1(-12.885,114.9) -6.973,120.812 v1(-6.973,122.825) -6.973,122.918 -6.19,123.702 17.065,123.702 22,128.637 22,131.792 23.353,133.146 v1(26.873,133.146)
  Int4 (PWR) w0.09: v1(-15.58,84.422) -15.58,89.646 -15.499,89.646 -15.476,89.669 -15.446,89.669 -15.228,89.887 -15.228,94.66 -15.609,95.042 -15.609,96.242 -15.181,96.67 -13.573,96.67 -13.069,97.173 -13.069,101.247 -13.039,101.277 -13.039,111.827 -13.157,111.945 -13.157,114.628 v1(-12.885,114.9)
  Bottom Layer w0.09: U10.14@-15.795,82.288 -15.795,84.088 -15.58,84.303 v1(-15.58,84.422)
CH446_CS_G: U11.14 U13.15 | length 1.4
  Top Layer w0.09: v1(29.257,130.897) U13.15@29.257,132.331
CH446_CS_H: U12.14 U13.16 | length 62.6
  Top Layer w0.09: v1(29.655,131.31) 29.657,131.312 U13.16@29.657,132.331
  Int2 (Sign) w0.09: v1(34.21,115.895) 34.21,115.24 34.58,114.87 42.21,114.87 v1(44.685,112.395)
  Int3 (Sign) w0.09: v1(29.655,131.31) 29.655,121.486 34.21,116.931 v1(34.21,115.895)
  Int4 (PWR) w0.09: v1(40.205,83.901) 40.205,91.359 44.685,95.839 v1(44.685,112.395)
  Bottom Layer w0.09: U12.14@40.205,82.288 v1(40.205,83.901)
CH446_CS_I: U13.31 U23.14 | length 2.3
  Top Layer w0.09: U13.31@35.26,133.935 v1(36.311,133.935)
  Bottom Layer w0.09: U23.14@-1.913,100.013 -1.913,100.438 -1.3,101.051
CH446_CS_J: U13.32 U24.14 | length 1.6
  Top Layer w0.09: U13.32@35.26,134.335 v1(36.877,134.335)
CH446_CS_K: U13.34 U25.14 | length 1.1
  Top Layer w0.09: U13.34@35.26,135.135 36.329,135.135 v1(36.334,135.14)
CH446_CS_L: U13.35 U26.14 | length 1.6
  Top Layer w0.09: U13.35@35.26,135.535 36.865,135.535 v1(36.869,135.539)
CH446_DATA: U5.36 U6.36 U7.36 U8.36 U9.36 U10.36 U11.36 U12.36 U13.17 U23.36 U24.36 U25.36 U26.36 | length 213.3
  Top Layer w0.09: U13.17@30.057,132.331 30.057,130.914 v1(30.074,130.897)
  Int3 (Sign) w0.09: v1(18.971,94.32) 21.162,94.32 v1(21.405,94.077) 23.222,92.26 25.436,92.26 25.685,92.011 30.35,92.011 30.566,92.227 32.55,92.227 33.07,91.707 34.422,91.707 34.747,92.032 34.891,92.032 v1(35.236,92.377) ; v1(30.074,130.897) v1(30.074,130.897) 30.075,121.485 35.025,116.535 v1(35.025,115.89)
  Int4 (PWR) w0.09: v1(35.236,92.377) v1@35.277,92.418
  Bottom Layer w0.09: U5.36@-34.713,111.468 -34.713,112.279 -33.935,113.057 -33.935,113.988 -33.598,114.326 -31.499,114.326 -31.296,114.529 -30.831,114.529 -30.628,114.326 -21.906,114.326 -20.918,113.337 -20.918,111.673 U6.36@-20.713,111.468 -20.713,111.043 -20.137,110.467 -9.201,110.467 -8.469,109.735 -7.429,109.735 -6.713,110.451 U23.36@-6.713,111.483 -6.508,111.688 -6.508,112.322 -5.745,113.085 -5.745,113.813 -5.078,114.48 6.42,114.48 6.854,114.046 6.854,113.454 7.287,113.02 U26.36@7.287,111.483 7.287,111.058 8.597,109.748 13.575,109.748 14.128,110.3 20.53,110.3 U7.36@21.287,111.058 ; U9.36@-34.595,93.743 -34.595,93.318 -33.695,92.418 -21.51,92.418 U10.36@-20.595,93.333 ; U10.36@-20.595,93.758 U10.36@-20.595,93.333 ; U24.36@-6.595,93.758 -6.595,92.603 -7.57,91.628 -10.665,91.628 -10.787,91.749 -11.057,91.749 -11.725,92.418 -15.034,92.418 -15.703,91.749 -19.012,91.749 U10.36@-20.595,93.333 ; U24.36@-6.418,94.36 -6.078,94.7 1.282,94.7 1.587,95.005 2.442,95.005 2.594,94.853 5.403,94.853 5.556,94.7 6.857,94.7 U25.36@7.39,94.168 ; U25.36@7.39,93.743 U25.36@7.39,94.168 ; v1(18.971,94.32) 17.903,94.32 17.531,94.692 7.914,94.692 U25.36@7.39,94.168 ; U7.36@21.287,111.483 U7.36@21.287,111.058 ; v1(35.025,115.89) 35.025,112.17 35.287,111.908 U8.36@35.287,111.483 U8.36@35.287,111.058 ; v1(35.236,92.377) 35.236,93.589 U12.36@35.405,93.758 35.405,94.875 34.892,95.388 34.892,96.142 35.047,96.298 40.34,96.298 42.366,98.324 42.366,100.738 41.687,101.417 41.687,104.658 U8.36@35.287,111.058 ; U7.36@21.287,111.058 22.041,110.304 31.562,110.304 32.011,110.753 33.189,110.753 33.649,110.294 35.107,110.294 35.287,110.474 U8.36@35.287,111.058
CH446_RESET: U5.41 U6.41 U7.41 U8.41 U9.41 U10.41 U11.41 U12.41 U13.36 U23.41 U24.41 U25.41 U26.41 | length 172.4
  Top Layer w0.09: U13.36@35.26,135.935 36.335,135.935 v1(36.348,135.947)
  Int2 (Sign) w0.09: v1(-30.656,112.478) -23.61,112.478 -23.607,112.482 -22.874,112.482 -22.87,112.478 -22.088,112.478 -21.283,111.673 -16.737,111.673 v1(-16.586,111.824) -3.187,111.824 v1(-2.689,112.322) 11.297,112.322 v1(11.445,112.47) 20.592,112.47 21.201,111.861 v1@25.188,111.861 ; v1(25.188,111.679) v1@25.188,111.861 ; v1(39.287,112.051) 38.915,111.679 32.101,111.679 31.919,111.861 v1@25.188,111.861
  Int3 (Sign) w0.09: v1(-20.784,95.077) -20.489,95.077 -20.103,94.69 -17.073,94.69 v1(-16.578,94.195) ; v1(11.39,94.32) 11.919,93.791 15.131,93.791 16.032,94.692 21.442,94.692 22.491,95.74 22.491,95.875 22.943,96.327 24.032,96.327 24.485,95.875 24.485,95.517 v1(25.405,94.597) 26.161,93.841 31.467,93.841 32.476,92.833 38.014,92.833 v1(39.405,94.223) ; v1(36.348,135.947) 38.728,135.947 41.051,133.624 v1@41.051,116.074
  Bottom Layer w0.09: U5.41@-30.713,111.468 -30.656,111.525 v1(-30.656,112.478) ; U9.41@-30.595,93.743 -30.595,93.318 -30.038,92.76 -28.048,92.76 -26.969,93.84 -26.969,94.385 -26.687,94.666 -24.267,94.666 -24.107,94.826 -21.686,94.826 -21.455,95.057 -20.803,95.057 v1(-20.784,95.077) ; U10.41@-16.595,93.758 -16.578,93.775 v1(-16.578,94.195) ; U23.41@-2.713,111.483 -2.689,111.507 v1(-2.689,112.322) ; U26.41@11.287,111.483 11.287,112.274 11.445,112.432 v1(11.445,112.47) ; U11.41@25.405,93.758 v1(25.405,94.597) ; U8.41@39.287,111.483 39.287,107.371 41.877,104.781 41.877,101.632 42.576,100.933 42.576,97.86 39.405,94.689 v1(39.405,94.223) ; v1(39.287,112.051) 39.287,112.619 41.055,114.387 v1(41.055,116.07)
CH446_VDD: C18.2 C26.2 C27.2 C28.2 C29.2 C30.2 C31.2 C32.2 C33.2 C73.2 C74.2 C75.2 C76.2 D3.2 D4.1 R11.2 TP5.1 U5.38 U6.38 U7.38 U8.38 U9.38 U10.38 U11.38 U12.38 U18.4 U23.38 U24.38 U25.38 U26.38 | length 13.3
  Int4 (PWR) w0.5: v1(13.886,143.497) 17.566,143.497 cw(c17.566,141.358) v1(19.705,141.358)
  Bottom Layer w0.09: D4.1@13.255,143.358 v1(13.886,143.497)
  Bottom Layer w0.127: D3.2@19.705,139.758 D3.2@19.705,139.958
  Bottom Layer w0.5: C18.2@17.305,140.258 17.305,139.958 D3.2@19.705,139.958 v1(19.705,141.358) ; D3.2@19.705,139.758 R11.2@21.055,139.758
CH446_VEE: C25.2 D7.2 D9.1 R13.2 TP15.1 U5.16 U6.16 U7.16 U8.16 U9.16 U10.16 U11.16 U12.16 U18.11 U23.16 U24.16 U25.16 U26.16 | length 6.8
  Bottom Layer w0.5: C25.2@1.455,137.358 4.005,137.358 4.255,137.608 4.405,137.608 D9.1@4.405,137.758 4.405,137.908 4.755,138.258 R13.2@6.055,138.258 7.42,138.258 v1(7.605,138.073)
CROSS_AI: U5.31 U23.33 | length 29.4
  Int3 (Sign) w0.09: v1(-36.901,108.189) -35.683,108.189 -33.961,109.911 -22.637,109.911 -22.56,109.834 -11.152,109.834 v1(-10.891,110.095)
  Bottom Layer w0.09: U5.31@-38.048,108.133 -37.992,108.189 v1(-36.901,108.189) ; v1(-10.891,110.095) -11,110.095 -11,109.863 -10.163,109.863 U23.33@-10.048,109.748
CROSS_AJ: U5.30 U24.33 | length 43.2
  Int2 (Sign) w0.09: v1(-21.032,96.602) -20.973,96.662 -20.833,96.662 -20.824,96.67 -13.805,96.67 -13.428,96.293 v1(-13.428,96.252)
  Int3 (Sign) w0.09: v1(-34.517,96.82) -34.431,96.906 -30.883,96.906 -30.793,96.995 -30.485,96.995 -30.396,96.906 -29.2,96.906 -29.164,96.87 -28.541,96.87 -28.505,96.906 -27.577,96.906 -26.969,96.298 -21.336,96.298 v1(-21.032,96.602)
  Int4 (PWR) w0.09: v1(-37.476,100.713) cw(c-37.19,100.426) -37.19,100.832 -36.92,100.832 ccw(c-36.92,101.69) -36.313,101.083 ccw(c-36.691,101.461) -36.156,101.461 -36.156,106.099 v1(-36.194,106.137)
  Bottom Layer w0.09: U5.30@-38.048,107.333 -37.225,107.333 -36.414,106.522 -36.414,106.358 v1(-36.194,106.137) ; v1(-37.476,100.713) -37.476,99.87 ccw(c-34.936,99.87) -36.732,98.074 -35.865,97.206 ccw(c-34.932,98.138) -34.932,96.82 v1(-34.517,96.82) ; v1(-13.428,96.252) -13.428,93.189 -12.86,92.621 -11.657,92.621 -11.059,92.023 U24.33@-9.93,92.023
CROSS_AK: U5.6 U25.33 | length 46.9
  Int3 (Sign) w0.09: v1(-29.447,102.013) -29.447,99.007 -28.853,98.412 v1(-28.853,97.622) ; v1(-28.595,94.708) -27.741,94.708 -27.327,94.294 v1(-26.315,94.294) ; v1(-23.014,94.294) -23.008,94.294 -21.474,92.76 -0.41,92.76 -0.3,92.65 2.084,92.65 v1(2.11,92.624)
  Int4 (PWR) w0.09: v1(-28.853,97.622) -28.853,94.966 v1(-28.595,94.708)
  Bottom Layer w0.09: v1(-29.447,102.013) -29.447,103.834 -27.549,105.733 U5.6@-26.578,105.733 ; v1(-26.315,94.294) v1(-23.014,94.294) ; v1(2.11,92.624) 3.014,92.624 3.63,92.008 U25.33@4.055,92.008
CROSS_AL: U5.33 U26.33 | length 42.3
  Int2 (Sign) w0.09: v1(-36.932,109.852) -36.914,109.834 -11.156,109.834 -11.045,109.723 -6.348,109.723 -6.067,110.003 2.179,110.003 v1(2.424,109.758)
  Bottom Layer w0.09: U5.33@-38.048,109.733 -37.929,109.852 v1(-36.932,109.852) ; v1(2.424,109.758) 3.942,109.758 U26.33@3.952,109.748
CROSS_BI: U6.29 U23.35 | length 19.7
  Int3 (Sign) w0.09: v1(-20.616,107.527) -20.574,107.569 -20.236,107.569 -18.301,109.504 -13.426,109.504 -13.413,109.491 -8.307,109.491 -8.101,109.696 -8.101,109.853 -7.932,110.023 v1(-7.932,110.107)
  Bottom Layer w0.09: U6.29@-24.048,106.533 -21.245,106.533 -20.616,107.162 v1(-20.616,107.527) ; v1(-7.932,110.107) -7.872,110.166 -7.671,110.166 -7.668,110.169 -7.626,110.169 -7.513,110.282 U23.35@-7.513,111.483
CROSS_BJ: U6.28 U24.35 | length 24.7
  Int3 (Sign) w0.09: v1(-18.102,102.295) -14.834,99.028 -11.699,99.028 -11.509,98.838 -11.498,98.838 -11.075,98.415 -11.075,98.405 -10.787,98.116 v1(-10.787,98.062)
  Int4 (PWR) w0.09: v1(-10.787,98.062) -10.787,95.306 v1(-10.712,95.231)
  Bottom Layer w0.09: U6.28@-24.048,105.733 -19.441,105.733 -18.513,104.805 -18.513,102.707 v1(-18.102,102.295) ; v1(-10.712,95.231) -10.26,94.78 -7.992,94.78 -7.395,94.183 U24.35@-7.395,93.758
CROSS_BK: U6.8 U25.35 | length 26.6
  Top Layer w0.127: v1(-11.152,103.926) v1@-11.1,103.873
  Int2 (Sign) w0.09: -7.735,103.926 -2.909,99.1 -2.909,97.131 v1(-2.664,96.885) ; v1(5.228,96.429) 5.257,96.4 6.18,96.4 6.705,95.875 6.705,95.168 6.59,95.053 v1(6.59,94.261)
  Int2 (Sign) w0.127: v1(-11.152,103.926) -7.735,103.926
  Int3 (Sign) w0.09: v1(-2.664,96.885) -2.026,96.885 -1.869,97.042 -1.29,97.042 -0.922,96.673 0.144,96.673 v1(0.493,97.022)
  Int4 (PWR) w0.09: v1(0.493,97.022) 0.552,97.081 0.759,97.081 0.779,97.101 4.556,97.101 v1(5.228,96.429)
  Bottom Layer w0.09: U25.35@6.59,93.743 v1(6.59,94.261)
  Bottom Layer w0.127: U6.8@-12.578,104.133 -11.433,104.133 -11.226,103.926 v1(-11.152,103.926)
CROSS_BL: U6.33 U26.35 | length 31.6
  Int3 (Sign) w0.09: v1(-20.805,110.206) -20.408,110.602 -7.943,110.602 -7.856,110.514 v1(4.693,110.514)
  Bottom Layer w0.09: U6.33@-24.046,109.735 U6.33@-24.048,109.733 -21.277,109.733 v1(-20.805,110.206) ; v1(4.693,110.514) 5.944,110.514 6.487,111.058 U26.35@6.487,111.483
CROSS_CI: U7.27 U23.37 | length 29.5
  Int2 (Sign) w0.09: v1(-5.745,108.827) -5.428,108.51 v1(16.828,108.51)
  Int3 (Sign) w0.09: v1@16.825,108.507 v1(16.828,108.51)
  Int4 (PWR) w0.09: v1(16.828,108.51) 16.828,105.215 17.084,104.96 v1(17.428,104.96)
  Bottom Layer w0.09: U23.37@-5.913,111.483 -5.913,109.079 -5.745,108.911 v1(-5.745,108.827) ; v1(17.428,104.96) U7.27@17.44,104.948
CROSS_CJ: U7.26 U24.37 | length 2.4
  Bottom Layer w0.09: U7.26@17.952,104.148 18.377,104.148 19.555,102.97 19.555,102.906 19.705,102.756 v1(19.779,102.756)
CROSS_CK: U7.24 U25.37
CROSS_CL: U7.33 U26.37
CROSS_DI: U8.3 U23.39 | length 51.7
  Int3 (Sign) w0.09: v1(-3.984,109.363) -3.899,109.447 -1.237,106.785 14.297,106.785 14.501,106.989 14.925,106.989 15.474,107.538 28.261,107.538 29.231,108.507 41.399,108.507 41.761,108.146 v1(42.344,108.146)
  Bottom Layer w0.09: U23.39@-4.313,111.483 -4.313,109.861 -3.984,109.531 v1(-3.984,109.363) ; v1(42.344,108.146) 42.346,108.148 U8.3@43.422,108.148
CROSS_DJ: U8.4 U24.39 | length 63.9
  Int2 (Sign) w0.09: v1(-3.951,91.567) 1.316,91.567 2,92.252 2.264,92.252 2.482,92.47 2.482,92.734 2.863,93.114 2.863,93.906 2.347,94.422 2.347,94.574 v1(2.288,94.633)
  Int3 (Sign) w0.09: v1(2.288,94.633) 1.821,95.1 1.821,96.093 1.514,96.4 1.514,96.885 1.815,97.185 1.815,98.557 2.076,98.819 2.076,99.521 1.924,99.674 1.924,99.982 2.076,100.135 2.076,103.1 4.54,105.564 16.116,105.564 16.448,105.897 22.438,105.897 22.445,105.889 27.345,105.889 ; 27.346,105.89 31.594,105.89 33.014,107.31 v1(42.338,107.31)
  Bottom Layer w0.09: U24.39@-4.195,93.758 -4.195,92.175 -3.951,91.931 v1(-3.951,91.567) ; v1(42.338,107.31) 42.376,107.348 U8.4@43.422,107.348
CROSS_DK: U8.2 U25.39 | length 48.9
  Int2 (Sign) w0.09: v1(9.79,93.167) 9.354,93.167 9.172,92.985 8.82,92.985 6.99,94.815 6.99,98.91 11.388,103.308 19.536,103.308 19.546,103.318 20.011,103.318 20.021,103.308 26.145,103.308 31.741,108.904 v1(42.358,108.904)
  Bottom Layer w0.09: v1(9.79,93.167) U25.39@9.79,93.743 ; v1(42.358,108.904) 42.401,108.948 U8.2@43.422,108.948
CROSS_DL: U8.33 U26.39 | length 24.4
  Int2 (Sign) w0.09: v1(9.759,110.393) 9.858,110.294 v1(32.292,110.294)
  Bottom Layer w0.09: U26.39@9.687,111.483 9.759,111.411 v1(9.759,110.393) ; U8.33@31.952,109.748 31.952,109.954 v1(32.292,110.294)
CROSS_EI: U9.30 U23.17 | length 40.1
  Int2 (Sign) w0.09: v1(-23.403,95.615) -23.403,95.996 -22.396,97.003 -18.995,97.003 -18.595,97.403 -18.595,98.015 -17.583,99.028 -5.868,99.028 -5.672,98.832 v1(-5.589,98.832)
  Int3 (Sign) w0.09: v1(-36.975,89.608) -36.975,91.624 -36.235,92.363 -26.689,92.363 -23.437,95.615 v1(-23.403,95.615)
  Bottom Layer w0.09: U9.30@-37.93,89.608 v1(-36.975,89.608) ; v1(-5.589,98.832) -5.068,98.832 -4.313,99.588 U23.17@-4.313,100.013
CROSS_EJ: U9.5 U24.17 | length 34.9
  Int3 (Sign) w0.09: v1(-29.397,86.867) -25.724,83.194 -4.748,83.194 -4.177,82.623 -4.177,81.633 v1(-3.527,80.982)
  Bottom Layer w0.09: v1(-29.397,86.867) -29.397,88.111 -28.7,88.808 U9.5@-26.46,88.808 ; U24.17@-4.195,82.288 -3.99,82.083 -3.99,81.446 v1(-3.527,80.982)
CROSS_EK: U9.6 U25.17 | length 43.3
  Int2 (Sign) w0.09: v1(-28.363,87.59) -24.66,83.888 v1@9.662,83.888
  Bottom Layer w0.09: v1(-28.363,87.59) -27.945,88.008 U9.6@-26.46,88.008 ; v1(9.696,83.899) 9.79,83.805 U25.17@9.79,82.273
CROSS_EL: U9.33 U26.17 | length 55.7
  Int2 (Sign) w0.09: v1(0.926,96.722) 0.93,96.726 1.884,96.726 v1(1.886,96.729)
  Int3 (Sign) w0.09: v1(-37.558,92.601) -37.642,92.601 -37.789,92.747 -37.822,92.747 -37.93,92.855 -37.93,94.457 -35.291,97.096 -34.767,97.096 -34.671,97.192 -34.363,97.192 -34.267,97.096 -30.961,97.096 -30.872,97.185 -30.406,97.185 -30.317,97.096 -29.122,97.096 -29.086,97.06 -28.62,97.06 -28.584,97.096 -27.439,97.096 -26.83,96.488 -25.133,96.488 -24.915,96.706 -24.915,96.713 -24.543,97.085 -15.862,97.085 -15.389,96.611 -13.595,96.611 -13.582,96.624 -13.274,96.624 -13.262,96.611 -9.272,96.611 -8.958,96.298 -1.415,96.298 -1.37,96.342 0.529,96.342 0.909,96.722 v1(0.926,96.722) ; v1(1.886,96.729) v1(1.886,96.729) 2.257,97.101 5.351,97.101 5.548,96.904 8.899,96.904 9.405,97.41 v1(9.405,97.782)
  Bottom Layer w0.09: U9.33@-37.93,92.008 -37.93,92.393 -37.722,92.601 v1(-37.558,92.601) ; v1(9.405,97.782) 9.432,97.782 9.687,98.037 U26.17@9.687,100.013
CROSS_FI: U10.28 U23.15 | length 35.9
  Int3 (Sign) w0.09: v1(-25.287,96.86) -25.235,96.912 -24.985,96.912 -24.622,97.275 -15.784,97.275 -15.31,96.801 -13.674,96.801 -13.661,96.814 -13.196,96.814 -13.183,96.801 -9.193,96.801 -8.88,96.488 -4.784,96.488 -3.455,97.817 -3.455,97.891 -3.281,98.065 v1(-3.281,98.149)
  Int4 (PWR) w0.09: v1(-25.287,96.86) -25.287,96.798 -25.493,96.592 -25.493,96.496 -25.899,96.09 -25.899,89.6 -25.875,89.576 -25.875,89.432 -25.657,89.214 -25.134,89.214 v1(-25.093,89.255)
  Bottom Layer w0.09: v1(-25.093,89.255) -25.034,89.195 -25.034,88.701 -24.355,88.023 U10.28@-23.93,88.023 ; v1(-3.281,98.149) -3.281,98.226 -3.083,98.424 -3.083,98.832 -2.713,99.203 U23.15@-2.713,100.013
CROSS_FJ: U10.7 U24.15 | length 14
  Int3 (Sign) w0.09: v1(-10.932,86.795) -9.183,86.795 -9.06,86.672 -7.394,86.672 -7.223,86.843 -3.768,86.843 -2.939,86.015 v1(-2.939,84.935)
  Bottom Layer w0.09: U10.7@-12.46,87.223 -12.27,87.033 -11.17,87.033 v1(-10.932,86.795) ; v1(-2.939,84.935) -2.939,84.784 -2.595,84.44 U24.15@-2.595,82.288
CROSS_FK: U10.8 U25.15 | length 27.3
  Int3 (Sign) w0.09: v1(-11.141,85.831) -4.94,85.831 -3.672,84.563 11.478,84.563 v1(11.776,84.265)
  Bottom Layer w0.09: U10.8@-12.46,86.423 -11.764,86.423 -11.172,85.831 v1(-11.141,85.831) ; U25.15@11.39,82.273 11.39,83.458 11.776,83.844 v1(11.776,84.265)
CROSS_FL: U10.33 U26.15 | length 44.6
  Top Layer w0.09: v1(11.25,99.471) 12.024,98.697 v1(12.024,95.859)
  Int2 (Sign) w0.09: v1(5.262,91.7) 5.978,92.415 12.4,92.415 v1(12.299,92.314)
  Int3 (Sign) w0.09: v1(-21.736,91.898) -21.694,91.939 -1.442,91.939 -1.138,91.636 1.958,91.636 2.022,91.7 v1(5.262,91.7)
  Int4 (PWR) w0.09: v1(12.024,95.859) 12.024,92.589 v1(12.299,92.314)
  Bottom Layer w0.09: U10.33@-23.93,92.023 -21.861,92.023 v1(-21.736,91.898)
CROSS_GI: U11.26 U23.13 | length 32.8
  Int2 (Sign) w0.09: v1(-0.76,98.116) -0.68,98.116 -0.68,96.946 -0.741,96.885 -0.741,96.883 -0.756,96.868 -0.756,96.274 -0.731,96.249 -0.731,92.017 v1(-0.722,92.008)
  Int2 (Sign) w0.127: v1(-0.76,98.116) v1@-0.708,98.168
  Int3 (Sign) w0.09: v1(-0.367,86.672) -0.367,86.588 -0.172,86.393 -0.172,86.33 0.082,86.075 v1(16.927,86.075)
  Int4 (PWR) w0.09: v1(-0.722,92.008) -0.741,91.988 -0.741,90.278 -0.782,90.237 -0.782,89.929 -0.741,89.888 -0.741,87.632 -0.367,87.258 v1(-0.367,86.672)
  Bottom Layer w0.09: U23.13@-1.113,100.013 -0.908,99.808 -0.908,99.376 -0.76,99.229 v1(-0.76,98.116) ; v1(16.927,86.075) 17.275,86.423 U11.26@18.07,86.423
CROSS_GJ: U11.25 U24.13 | length 30.7
  Int3 (Sign) w0.09: v1(-0.995,80.982) -0.982,80.969 -0.982,80.702 -0.915,80.635 -0.915,79.962 -0.123,79.17 18.538,79.17 19.918,80.55 v1(19.918,84.823)
  Bottom Layer w0.09: v1(-0.995,80.982) U24.13@-0.995,82.288 ; U11.25@18.07,85.623 18.111,85.582 19.41,85.582 19.918,85.073 v1(19.918,84.823)
CROSS_GK: U11.24 U25.13 | length 6.9
  Int2 (Sign) w0.09: v1(13.779,84.341) 14.246,84.808 v1(17.055,84.808)
  Bottom Layer w0.09: U25.13@12.99,82.273 12.99,83.551 v1(13.779,84.341) ; v1(17.055,84.808) 17.07,84.823 U11.24@18.07,84.823
CROSS_GL: U11.33 U26.13 | length 10.4
  Int2 (Sign) w0.09: v1(12.853,99.471) 13.8,99.471 14.86,98.411 14.86,97.827 15.586,97.101 15.842,97.101 v1(17.084,95.859) ; v1(16.642,94.273) 16.642,92.804 v1(17.423,92.023)
  Int4 (PWR) w0.09: v1@16.642,94.283 v1(16.642,94.273) 17.084,94.715 v1(17.084,95.859)
CROSS_HI: U12.4 U23.11 | length 51.5
  Int2 (Sign) w0.09: v1(41.687,95.576) 41.687,90.321 v1(42.419,89.59)
  Int3 (Sign) w0.09: v1(2.296,99.828) 3.032,99.092 3.488,99.092 4.165,98.415 4.165,97.73 4.501,97.394 7.395,97.394 v1(7.411,97.41) ; v1(28.958,96.72) 40.543,96.72 v1(41.687,95.576)
  Int4 (PWR) w0.09: v1(7.411,97.41) 7.428,97.394 28.284,97.394 v1(28.958,96.72)
  Bottom Layer w0.09: U23.11@1.422,101.748 1.847,101.748 2.052,101.543 2.052,100.072 v1(2.296,99.828) ; v1(42.419,89.59) 42.452,89.623 U12.4@43.54,89.623
CROSS_HJ: U12.1 U24.11 | length 56.3
  Int2 (Sign) w0.09: v1(2.025,81.555) 41.31,81.555 44.745,84.99 44.745,88.96 43.498,90.208 43.498,91.561 43.05,92.008 v1(42.475,92.008)
  Bottom Layer w0.09: U24.11@1.54,84.023 1.82,84.023 2.025,83.818 v1(2.025,81.555) ; v1(42.475,92.008) 42.49,92.023 U12.1@43.54,92.023
CROSS_HK: U12.2 U25.11 | length 32.8
  Int2 (Sign) w0.09: v1(16.155,84.008) 34.845,84.008 37.419,86.582 v1(40.916,86.582)
  Int4 (PWR) w0.09: v1(40.916,86.582) 41.805,87.47 41.805,90.554 v1(42.46,91.209)
  Bottom Layer w0.09: U25.11@15.525,84.008 v1(16.155,84.008) ; v1(42.46,91.209) 42.473,91.223 U12.2@43.54,91.223
CROSS_HL: U12.33 U26.11 | length 24.2
  Int2 (Sign) w0.09: v1(26.662,99.011) 27.075,98.598 27.075,97.332 v1(27.687,96.72)
  Int3 (Sign) w0.09: v1(16.643,101.876) 16.655,101.864 19.447,101.864 19.635,101.676 23.996,101.676 v1(26.662,99.011)
  Bottom Layer w0.09: U26.11@15.422,101.748 16.431,101.748 16.56,101.876 v1(16.643,101.876) ; v1(27.687,96.72) 28.38,96.72 28.802,96.298 32.132,96.298 32.271,96.159 32.271,94.232 32.258,94.219 32.258,92.871 32.07,92.683 U12.33@32.07,92.023
CROSS_Rx: U13.27 U26.25 U30.4
CROSS_Tx: U13.28 U26.24 U29.4
CURR_SENSE_DAC_+_9: C50.2 R21.2 TP1.1 TP12.1 U20.8 U21.3 U21.14 | length 13.6
  Bottom Layer w0.127: C50.2@26.355,124.808 29.508,124.808 ccw(c29.508,125.745) 30.4,125.455 ; U21.14@30.4,122.292 30.4,125.455 ; U21.3@30.4,126.924 30.4,125.455
  Bottom Layer w0.5: TP1.1@-33.245,74.808 R21.2@-33.245,73.608 ccw(c-33,73.608) -33,73.363 U20.8@-31.22,73.363 ; C50.2@26.355,124.808 TP12.1@26.355,126.108
CURR_SENSE_DAC_-: U23.25 U26.4
CURRENT_SCL: R17.1 R20.1 R35.1 U13.7 U15.5 U19.4 U20.4 | length 14.8
  Top Layer w0.127: U15.5@22.133,130.897 23.137,130.897 23.435,131.195 R35.1@23.435,135.297 ; R35.1@23.602,135.466 23.768,135.633 24.41,135.633 24.712,135.935 U13.7@28.453,135.935
  Bottom Layer w0.5: U20.4@-25.97,69.553 -23.94,69.553 cw(c-23.94,69.508) R20.1@-23.895,69.508 ; U19.4@35.28,69.553 37.31,69.553 cw(c37.31,69.508) R17.1@37.355,69.508
CURRENT_SDA: R16.1 R19.1 R36.1 U13.6 U15.6 U19.3 U20.3 | length 18.7
  Top Layer w0.127: U15.6@22.133,129.627 21.258,129.627 21.075,129.81 21.075,131.265 21.435,131.625 22.23,131.625 22.83,132.225 22.83,135.808 23.435,136.413 R36.1@23.435,136.513 23.529,136.607 24.392,136.607 24.664,136.335 U13.6@28.453,136.335
  Bottom Layer w0.5: U20.3@-25.97,70.823 -23.93,70.823 ccw(c-23.93,70.858) R19.1@-23.895,70.858 ; U19.3@35.28,70.823 37.27,70.823 ccw(c37.27,70.908) R16.1@37.355,70.908